# Altium PCB PCB1.PcbDoc
Units mm, origin at the board's own origin, x right, y up, seen from the top; angles counter-clockwise.
Board outline 75 x 75 mm, 2 copper layers (Top Layer, Bottom Layer); 96 components, 51 nets, 235 pads, 79 vias.
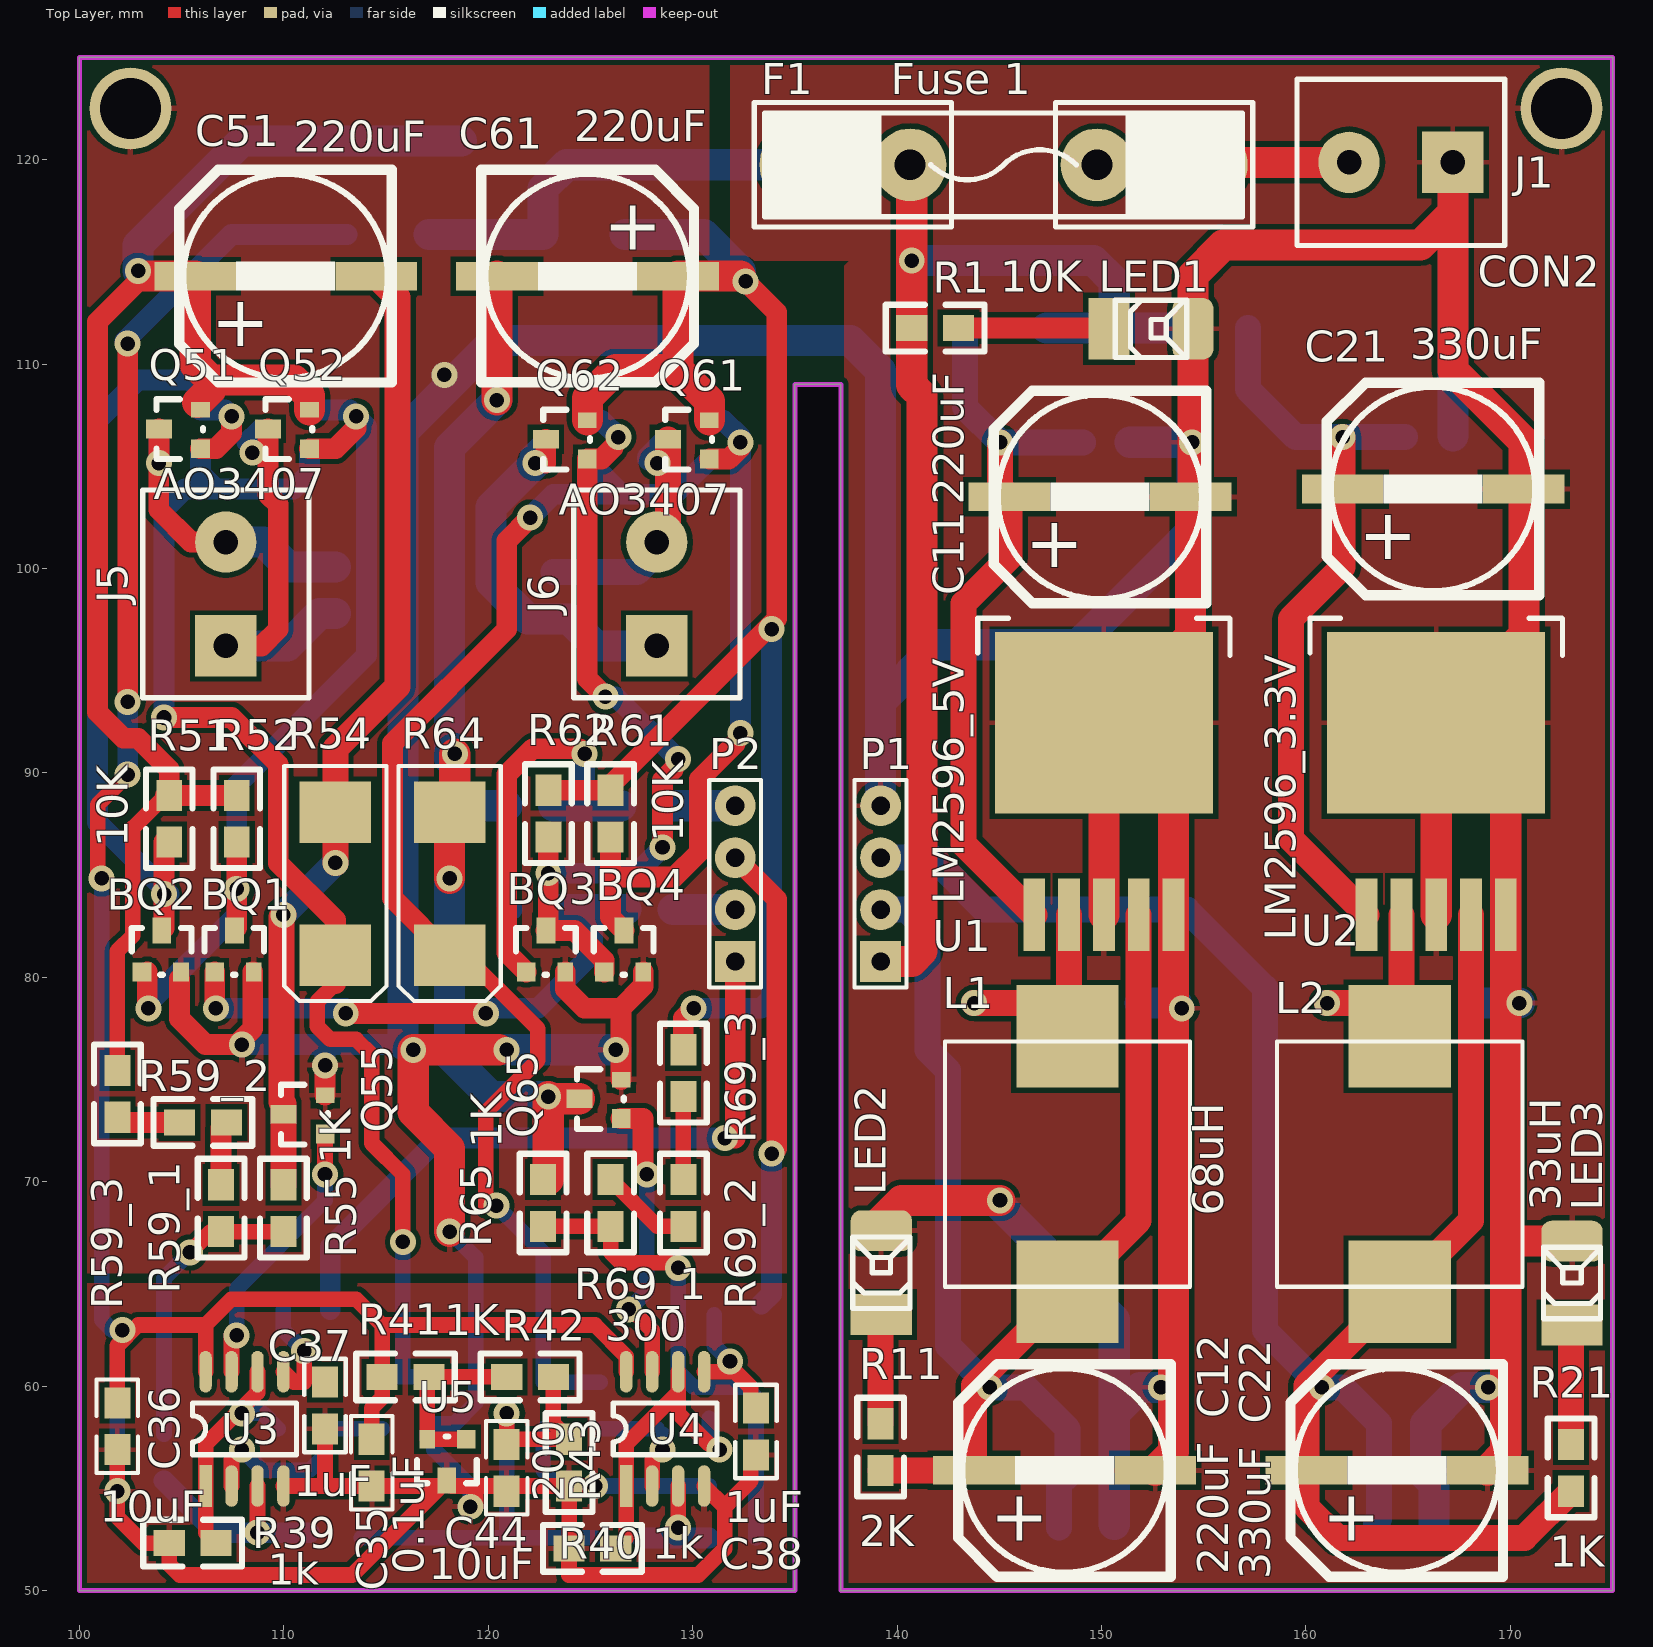
[diagram p0: Top Layer view]
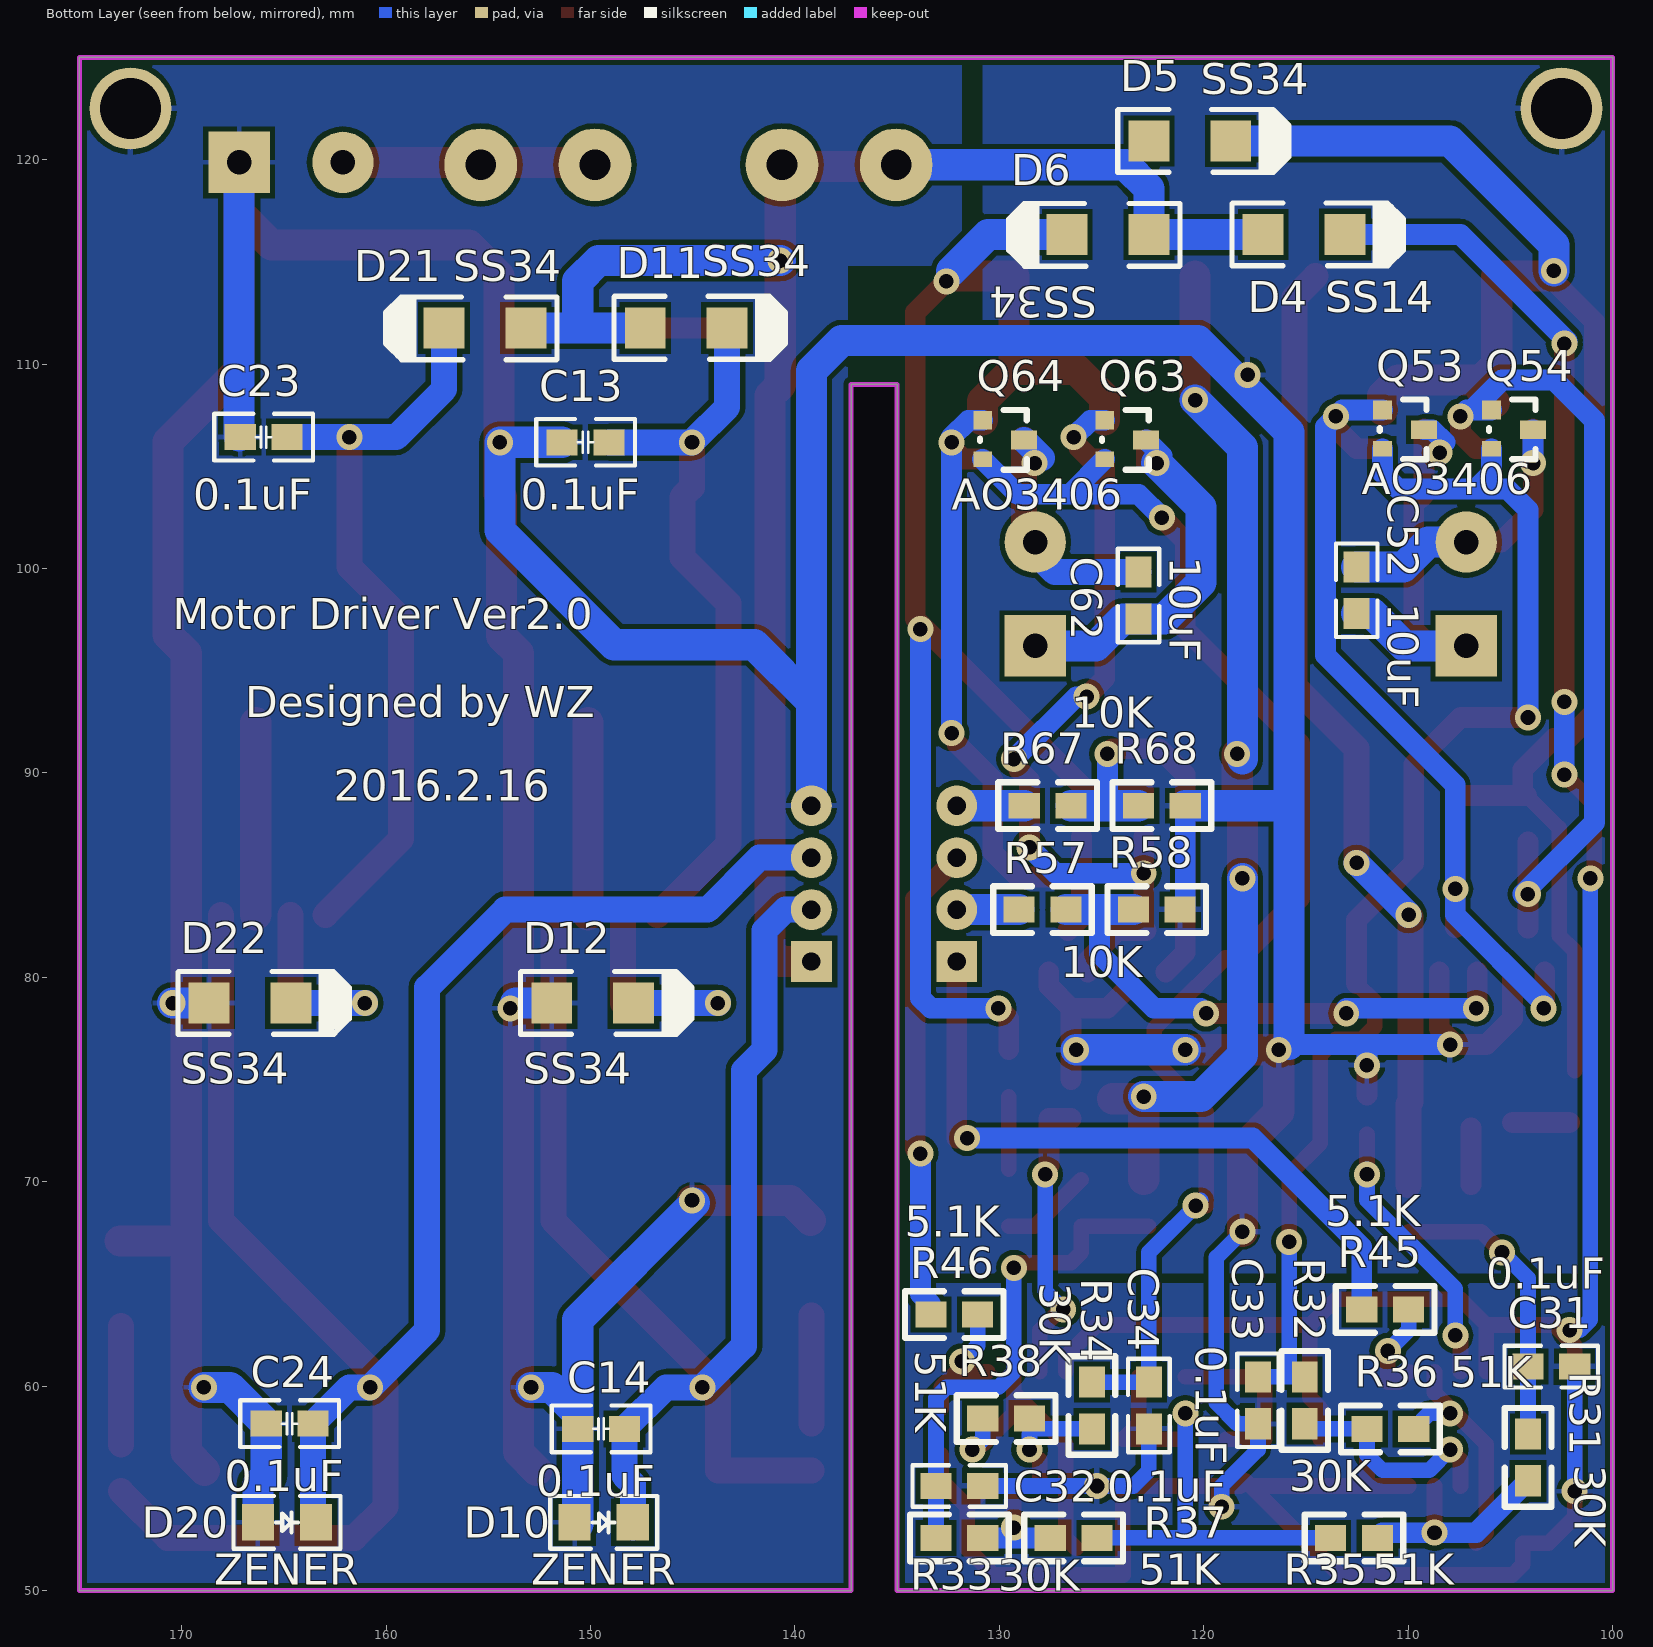
[diagram p1: Bottom Layer view, seen from below]

## Layer stack, top to bottom
Top Solder: solder mask 0.0102, Solder Resist, Dk 3.5
Top Layer: signal copper 0.0356
Dielectric 1: dielectric 0.32, FR-4, Dk 4.8
Bottom Layer: signal copper 0.0356
Bottom Solder: solder mask 0.0102, Solder Resist, Dk 3.5

## Board outline
100,50 100,125 175,125 175,50 137.25,50 137.25,109 135,109 135,50

## Design rules (kind name [scope] priority, off if disabled: settings)
Clearance [All] p1: gap=0.254
PolygonConnect [All] p1: connectstyle=Relief reliefconductorwidth=0.254 reliefentries=4 polygonreliefangle="90 Angle" airgapwidth=0.254
RoutingVias [All] p1: holewidth=0.711 width=1.27 viastyle="Through Hole" minholewidth=0.711 minwidth=1.27 maxholewidth=0.711 maxwidth=1.27
SolderMaskExpansion [All] p1: expansion=0.102
Width [All] p1: maxlimit=2.54 minlimit=0.762 preferedwidth=1.016
30 further rules are at their usual default settings.

## Classes and differential pairs
component class "power supply": C11 C12 C13 C14 C21 C22 C23 C24 D10 D11 D12 D20 D21 D22 F1 J1 L1 L2 LED1 LED2 LED3 P1 R1 R11 R21 U1 U2
component class motor: BQ1 BQ2 BQ3 BQ4 C51 C52 C61 C62 D5 D6 J5 J6 P2 Q51 Q52 Q53 Q54 Q55 Q61 Q62 Q63 Q64 Q65 R51 R52 R54 R55 R57 R58 R59_1 R59_2 R59_3 R61 R62 R64 R65 R67 R68 R69_1 R69_2 R69_3
component class analog: C31 C32 C33 C34 C35 C36 C37 C38 C44 D4 R31 R32 R33 R34 R35 R36 R37 R38 R39 R40 R41 R42 R43 R45 R46 U3 U4 U5

## Components (designator, comment, footprint, x,y, rotation, side; value= is the part's Value field where it differs from the comment)
BQ1 "9014" SOT-23 105.41,83.312 r0 top
BQ2 "9014" SOT-23 101.854,83.312 r0 top
BQ3 "9014" SOT-23 120.65,83.312 r0 top
BQ4 "9014" SOT-23 124.46,83.312 r0 top
C11 "220uF" SMD-EC-F10 145.5,103.5 r0 top
C12 "220uF" SMD-EC-F10 143.764,55.88 r0 top
C13 "0.1uF" 0805C 149.098,106.172 r0 bottom
C14 "0.1uF" 0805C 148.336,57.912 r0 bottom
C21 "330uF" SMD-EC-F10 161.798,103.886 r0 top
C22 "330uF" SMD-EC-F10 160.02,55.88 r0 top
C23 "0.1uF" 0805C 164.846,106.426 r0 bottom
C24 "0.1uF" 0805C 163.576,58.166 r0 bottom
C31 "0.1uF" "0805 CAP" 104.14,60.96 r180 bottom
C32 "0.1uF" "0805 CAP" 133.096,55.118 r180 bottom
C33 "0.1uF" "0805 CAP" 117.348,60.452 r270 bottom
C34 "0.1uF" "0805 CAP" 122.682,60.198 r270 bottom
C35 "0.1uF" "0805 CAP" 114.3,57.404 r270 top
C36 "10uF" "0805 CAP" 101.854,59.182 r270 top
C37 "1uF" "0805 CAP" 112.014,60.198 r270 top
C38 "1uF" "0805 CAP" 133.096,58.928 r270 top
C44 "10uF" "0805 CAP" 120.904,57.15 r270 top
C51 "220uF" SMD-EC-F10 105.664,114.3 r0 top
C52 "10uF" "0805 CAP" 112.522,100.076 r270 bottom
C61 "220uF" SMD-EC-F10 129.286,114.3 r180 top
C62 "10uF" "0805 CAP" 123.19,99.822 r270 bottom
D4 "SS14" SMA 117.094,116.332 r180 bottom
D5 "SS34" SMA 122.682,120.904 r180 bottom
D6 "SS34" SMA 122.682,116.332 r0 bottom
D10 "ZENER" 1206D 149.352,53.34 r180 bottom
D11 "SS34" SMA 147.32,111.762 r180 bottom
D12 "SS34" SMA 151.892,78.74 r180 bottom
D20 "ZENER" 1206D 164.846,53.34 r180 bottom
D21 "SS34" SMA 153.162,111.76 r0 bottom
D22 "SS34" SMA 168.656,78.74 r180 bottom
F1 "Fuse 1" FUSE1 145.206,119.746 r180 top
J1 "CON2" con2 164.592,119.888 r90 top
J5 "CON2" con2 107.188,98.806 r0 top
J6 "CON2" con2 128.27,98.806 r0 top
L1 "68uH" 12x12 148.336,70.866 r90 top
L2 "33uH" 12x12 164.592,70.866 r90 top
LED1 "LED" "3528 led" 153.67,112.522 r270 top
LED2 "LED" "3528 led" 138.43,66.802 r0 top
LED3 "LED" "3528 led" 172.212,66.294 r0 top
P1 "Header 4" HDR1X4 139.192,80.772 r90 top
P2 "Header 4" HDR1X4 132.08,80.772 r90 top
Q51 "AO3407" sot-23 102.87,104.648 r90 top
Q52 "AO3407" sot-23 108.204,104.648 r90 top
Q53 "AO3406" sot-23 108.204,108.966 r270 bottom
Q54 "AO3406" sot-23 102.87,108.966 r270 bottom
Q55 "AO3406" sot-23 108.966,71.12 r90 top
Q61 "AO3407" sot-23 127.762,104.14 r90 top
Q62 "AO3407" sot-23 121.792,104.14 r90 top
Q63 "AO3406" sot-23 121.792,108.458 r270 bottom
Q64 "AO3406" sot-23 127.762,108.458 r270 bottom
Q65 "AO3406" sot-23 123.444,71.882 r90 top
R1 "10K" 0805 143.002,111.76 r180 top
R11 "2K" 0805 139.192,58.166 r270 top
R21 "1K" 0805 172.974,57.15 r270 top
R31 "30K" 0805 104.14,55.372 r90 bottom
R32 "30K" 0805 115.062,58.166 r90 bottom
R33 "30K" 0805 130.81,52.578 r0 bottom
R34 "30K" 0805 125.476,57.912 r90 bottom
R35 "51K" 0805 113.792,52.578 r180 bottom
R36 "51K" 0805 109.728,57.912 r0 bottom
R37 "51K" 0805 125.222,52.578 r0 bottom
R38 "51K" 0805 130.81,58.42 r180 bottom
R39 "1k" 0805 104.394,52.324 r0 top
R40 "1k" 0805 123.952,52.07 r0 top
R41 "1K" 0805 117.094,60.452 r180 top
R42 "300" 0805 123.19,60.452 r180 top
R43 "200" 0805 123.952,55.118 r90 top
R45 "5.1K" 0805 112.268,63.754 r180 bottom
R46 "5.1K" 0805 133.35,63.5 r180 bottom
R51 "10K" 0805 104.394,86.614 r90 top
R52 "10K" 0805 107.696,86.614 r90 top
R54 "1" 2512 112.522,84.582 r270 top
R55 "1K" 0805 109.982,69.85 r270 top
R57 "10K" 0805 126.746,83.312 r0 bottom
R58 "10K" 0805 121.158,83.312 r0 bottom
R59_1 "0" 0805 106.934,69.85 r270 top
R59_2 "5.1K" 0805 107.188,72.898 r180 top
R59_3 "0" 0805 101.854,73.152 r90 top
R61 "10K" 0805 125.984,86.868 r90 top
R62 "10K" 0805 122.936,86.868 r90 top
R64 "1" 2512 118.11,84.582 r270 top
R65 "1K" 0805 122.682,70.104 r270 top
R67 "10K" 0805 126.492,88.392 r0 bottom
R68 "10K" 0805 120.904,88.392 r0 bottom
R69_1 "0" 0805 125.984,70.104 r270 top
R69_2 "5.1K" 0805 129.54,67.818 r90 top
R69_3 "0" 0805 129.54,74.168 r90 top
U1 "LM2596_5V" TO-263 150.114,92.456 r0 top
U2 "LM2596_3.3V" to-263 166.37,92.456 r0 top
U3 "LM358" so-8 106.172,55.118 r90 top
U4 "LM358" so-8 126.746,55.118 r90 top
U5 "TL431" sot-23 120.142,54.356 r180 top

## Footprints (in the part's own frame and the unit in brackets; to place one, negate y for a bottom-side part, rotate by r counter-clockwise, add the part's x,y. Pads: shape width x height; smd on the part's side, far side on the other; paste and mask are expansions set on the pad)
12x12 [mm]
  rect 5x5 smd: 1(-6.25,0) 2(6.25,0)
  silkscreen extent -6,-6 6,6, body extent -6.25,-6.22 6.25,6.28, height 6.7
0805 [mil]
  rect 60x50 smd: 1(0,-0.06) 2(90,-0.06)
  silkscreen extent -50,-45 140,45
"0805 CAP" [mil]
  rect 60x50 smd: 1(0,0) 2(90,0)
  silkscreen extent -45,-40 135,40, body extent 5,-24 84,24, height 37
0805C [mil]
  rect 60x50 smd: 1(0,0) 2(90,0)
  silkscreen extent -50,-45 140,45
1206D [mil]
  rect 62x70 smd: 1(-56,0) 2(56,0)
  silkscreen extent -103,-51 103,51
2512 [mm]
  rect 3x3.5 smd: 1(-3.5,0) 2(3.5,0)
  silkscreen extent -5.75,-2.5 5.75,2.5, body extent -3.27,-1.57 3.13,1.63, height 0.7
"3528 led" [mm]
  rect 3x2 smd paste+0: 1(0.8,-3.3)
  rrect50% 3x2 smd: 2(0.8,0.8)
  silkscreen extent -0.6,-3 2.2,0.5, body extent -0.7,-3.1 2.3,0.6, height 2.1
con2 [mm]
  rect 3x3 hole 1.2: 1(-0.024,-2.594)
  round 3 hole 1.2: 2(-0.024,2.486)
  silkscreen extent -4.09,-5.13 4.04,5.03, body extent -5.52,-4.95 2.48,5.05, height 11
FUSE1 [mil]
  round 140 hole 59.06: 1(-400,0) 1(-180,0) 2(180,0) 2(400,0)
  silkscreen extent -480,-120 480,120
HDR1X4 [mm] "Connector; Header; 4 Position"
  rect 2x2 hole 0.9: 1(0,0)
  round 2 hole 0.9: 2(2.54,0) 3(5.08,0) 4(7.62,0)
  silkscreen extent -1.27,-1.27 8.89,1.27
SMA [mm]
  rect 2x2 smd: 1(0,0) 2(4,0)
  silkscreen extent -1.52,-1.52 6.86,1.55
SMD-EC-F10 [mm]
  rect 4x1.4 smd: 1(0,0) 2(8.86,0)
  silkscreen extent -0.78,-5.2 9.62,5.2
so-8 [mil]
  rect 80x24 smd: 1(0,0)
  oval 80x24 smd: 2(0,-50) 3(0,-100) 4(0,-150) 5(220,-150) 6(220,-100) 7(220,-50) 8(220,0)
  silkscreen extent 60,-175 160,25
SOT-23 [mil]
  rect 36x36 smd: 1(47.76,-120.28)
  rect 30x36 smd: 2(122.76,-120.28)
  rect 36x50 smd: 3(85.76,-40.28)
  silkscreen extent 28,-125 143,-35
sot-23 [mil]
  rect 36x36 smd: 1(47.76,-120.28)
  rect 30x36 smd: 2(122.76,-120.28)
  rect 36x50 smd: 3(85.76,-40.28)
  silkscreen extent 28,-125 143,-35
TO-263 [mil]
  rect 42x140 smd: 1(-134,-370) 2(-67,-370) 3(0,-370) 4(67,-370) 5(134,-370)
  rect 420x350 smd: 3(0,0)
  silkscreen extent -243,130 243,201
to-263 [mil]
  rect 42x140 smd: 1(-134,-370) 2(-67,-370) 3(0,-370) 4(67,-370) 5(134,-370)
  rect 420x350 smd: 3(0,0)
  silkscreen extent -243,130 243,201

## Part data
BQ1 BQ2 BQ3 BQ4: "transistor"
C11 C12 C21 C22 C51 C61: library part "Electrolytic CAP"
C13 C14 C23 C24 C31 C32 C33 C34 C35 C36 C37 C38 C44 C52 C62: library part CAP
D4: "Diode"
D5 D6 D11 D12 D21 D22: library part SS14, "Diode"
F1: "Fuse"
L1 L2: library part Inductance
P1 P2: "Header, 4-Pin"
R1 R11 R21 R31 R32 R33 R34 R35 R36 R37 R38 R39 R40 R41 R42 R43 R45 R46 R51 R52 R54 R55 R57 R58 R59_1 R59_2 R59_3 R61 R62 R64 R65 R67 R68 R69_1 R69_2 R69_3: library part RES, "RES"
U1 U2: library part LM2596, "IC-power"
U5: "IC"

## Free pads (board coordinates)
  round 4 hole 3: 0(102.5,122.5) 0(172.5,122.5)

## Via types
v1: diameter 1.27, hole 0.711, Top Layer to Bottom Layer, 79 vias

## Nets (pads, with @x,y where several pads share a name; then routed paths per layer and width w, separated by ;. In a path a pad name is that pad's centre, name@x,y a point inside that pad or via, vN(x,y) a via of type N, cw(c..) or ccw(c..) an arc to the next point about the centre after c; other vN are vias at no path point)
GND: BQ1.2 BQ2.2 BQ3.2 BQ4.2 C11.2 C12.2 C13.2 C14.2 C21.2 C22.2 C23.2 C24.2 C31.2 C32.2 C33.2 C34.2 C35.2 C36.2 C37.2 C38.2 C44.2 D10.1 D12.1 D20.1 D22.1 J1.1 LED1.2 LED2.2 LED3.2 P1.4 pad.0 Q55.2 Q65.2 R39.1 R40.1 R43.1 R58.1 R68.1 U1.3 U1.5 U2.3 U2.5 U3.4 U4.4 U5.3 | length 469.5
  Top Layer w0.762: C36.2 101.854,53.594 103.126,52.322 R39.1 104.394,51.27 104.902,50.762 113.347,50.762 U5.3@117.703,55.118 ; U3.4 112.014,55.118 ; C37.2 112.014,55.118 ; v1(119.126,54.102) 119.38,54.102 119.38,55.118 ; R43.1 119.38,55.118 ; v1(125.222,55.118) R43.1 123.955,52.072 R40.1 123.952,50.762 130.273,50.762 131.572,52.061 131.572,54.102 ; U4.4 131.572,54.102 ; C38.2@132.842,56.642 132.842,55.372 131.572,54.102 ; 112.014,55.118 C35.2 U5.3@117.703,55.118 ; U5.3@117.703,55.118 U5.3 118.225,55.118 119.38,55.118
  Top Layer w1.016: BQ2.2@104.902,79.933 104.902,77.978 106.172,76.708 107.696,76.708 108.486,77.498 BQ1.2@108.486,80.257 ; Q55.2 v1(112.021,75.692) ; BQ3.2 123.768,79.432 124.714,78.486 126.492,78.486 127.578,79.572 BQ4.2 ; Q65.2 126.499,78.479
  Top Layer w1.524: v1(118.11,67.564) 118.11,71.628 116.332,73.406 v1(116.332,76.454) v1@120.523,76.454 ; LED2.2@139.23,68.11 140.208,69.088 v1(145.034,69.088) ; U1.3@150.114,83.058 U1.3@150.114,92.456 ; C12.2 153.518,56.774 U1.5 153.518,95.86 154.36,96.702 C11.2 ; C11.2@154.47,103.61 LED1.2 154.47,114.338 155.956,115.824 165.608,115.824 167.186,117.402 ; U2.3@166.37,83.058 U2.3@166.37,92.456 ; J1.1 167.186,117.402 ; C22.2 169.774,56.774 U2.5 169.774,95.86 170.658,96.744 C21.2 170.658,106.202 167.186,109.674 167.186,117.402 ; 169.812,67.094 LED3.2
  Bottom Layer w0.762: v1(101.854,54.864) C31.2 ; v1(118.11,67.564) 119.38,66.294 119.38,59.182 118.364,58.166 C33.2 117.348,56.896 119.126,55.118 v1@119.126,54.356 ; C34.2 122.682,55.88 123.444,55.118 v1(125.222,55.118) C32.2
  Bottom Layer w1.016: v1(107.95,76.708) 112.014,76.708 ; v1@112.014,75.699 112.014,76.708 ; v1@115.824,76.708 112.014,76.708 ; R68.1 120.904,83.568 R58.1
  Bottom Layer w1.524: v1@115.824,76.708 115.824,106.68 120.287,111.143 137.723,111.143 139.192,109.674 139.192,93.472 ; 115.826,88.394 R68.1 ; v1(120.904,76.454) v1(126.238,76.454) ; P1.4 139.192,93.472 ; v1@144.907,68.961 150.622,63.246 150.622,58.674 ; D10.1@150.622,53.238 C14.2 150.622,58.674 ; C13.2 v1(154.432,106.172) 154.432,101.854 148.844,96.266 141.986,96.266 139.192,93.472 ; D12.1 v1@153.67,78.74 ; v1(152.908,59.944) 151.892,59.944 150.622,58.674 ; D20.1 166.268,55.22 165.862,55.626 C24.2 167.64,59.944 v1(168.91,59.944) ; C23.2@167.186,106.48 J1.1 ; D22.1 v1(170.434,78.74)
  other v1: 153.924,78.486 117.856,109.474
"M1 C": Q55.1 U3.7 | length 13.7
  Top Layer w0.762: U3.7 v1@107.442,62.484 ; v1(112.014,70.358) Q55.1@112.014,72.326
  Bottom Layer w0.762: v1(107.696,62.484) 107.696,64.77 112.014,69.088 v1(112.014,70.358) v1@112.014,70.612
"M1 CUR": C33.1 Q53.2 Q54.2 R32.2 R54.2 | length 64.3
  Top Layer w0.762: R54.2@112.522,79.7 111.633,78.811 111.633,77.597 112.268,76.962 113.538,76.962 114.3,76.2 114.3,71.882 115.824,70.358 v1(115.824,67.056)
  Top Layer w1.016: v1(104.14,92.71) 107.442,92.71 109.728,90.424 109.728,85.598 112.522,82.804 R54.2 R54.2@112.522,79.7
  Bottom Layer w0.762: R32.2 C33.1 ; 115.824,60.452 v1(115.824,67.056)
  Bottom Layer w1.016: v1(104.14,92.71) 104.14,102.87 105.156,103.886 106.68,103.886 ; Q54.2@105.918,105.848 105.918,104.648 106.68,103.886 ; Q53.2 111.259,104.655 110.49,103.886 106.68,103.886
"M1 DIR": P2.2 R57.2 | length 3
  Bottom Layer w1.524: R57.2 P2.2@132.078,83.314
"M1 PWM": P2.1 R45.1 | length 32.7
  Top Layer w1.016: v1@132.08,72.136 P2.1
  Bottom Layer w1.016: R45.1 112.268,66.802 117.602,72.136 v1@131.064,72.136
  other v1: 131.572,72.136
"M1 S": R36.1 R39.2 U3.1 U3.6 | length 11.7
  Top Layer w0.762: R39.2 106.172,52.83 U3.1 106.172,57.15 108.712,59.69 U3.6
  Bottom Layer w0.762: v1(107.95,58.674) 108.968,58.674 R36.1
"M1 VOL": C31.1 R31.2 R55.2 R59_1.2 | length 14.4
  Top Layer w0.762: v1(105.41,66.548) 106.426,67.564 R59_1.2 R55.2
  Bottom Layer w0.762: R31.2@104.14,57.66 C31.1 104.14,65.278 v1(105.41,66.548)
"M2 C": Q65.1 U4.7 | length 13.9
  Top Layer w0.762: v1(126.873,63.754) 127,63.754 128.016,62.738 U4.7
  Top Layer w1.016: Q65.1 127.565,73.095 v1@127.565,70.809
  Bottom Layer w0.762: v1(126.873,63.754) 127.762,64.643 v1(127.762,70.358)
"M2 CUR": C34.1 Q63.2 Q64.2 R34.2 R64.2 | length 65.1
  Top Layer w0.762: R64.2@118.943,80.955 120.396,79.502 120.414,79.502 122.428,77.488 122.428,75.946 119.888,73.406 v1@119.888,68.834
  Top Layer w1.016: R64.2 115.316,83.876 115.316,91.44 120.904,97.028 120.904,101.346 v1(122.047,102.489)
  Bottom Layer w0.762: v1@120.142,69.088 122.682,66.548 C34.1 R34.2
  Bottom Layer w1.016: v1(122.047,102.489) 123.19,103.632 126.555,103.632 ; Q63.2 126.555,103.632 ; Q64.2 129.109,103.632 126.555,103.632
  other v1: 120.396,68.834
"M2 DIR": P2.4 R67.2 | length 3.3
  Bottom Layer w1.524: R67.2@128.78,88.392 P2.4
"M2 PWM": P2.3 R46.1 | length 22.6
  Top Layer w1.016: P2.3 134.111,83.821 v1@134.111,71.628
  Bottom Layer w1.016: R46.1@133.35,64.006 133.858,64.514 v1(133.858,71.374)
"M2 S": R38.1 R40.2 U4.1 U4.6 | length 14.8
  Top Layer w0.762: R40.2 126.746,52.576 U4.1 126.746,57.15 129.286,59.69 ; U4.6 129.286,59.69 ; v1@130.81,57.15 129.286,58.674 129.286,59.69
  Bottom Layer w0.762: R38.1 130.81,57.404 v1(131.318,56.896)
"M2 VOL": C32.1 R33.2 R65.2 R69_1.2 | length 24.4
  Top Layer w0.762: R65.2 R69_1.2 125.982,66.55 126.49,66.042 v1@129.284,66.042
  Bottom Layer w0.762: v1(129.286,65.786) 129.286,60.706 130.048,59.944 132.588,59.944 133.096,59.436 C32.1 R33.2
NetBQ1_b: BQ1.1 R57.1 R58.2 | length 26.3
  Top Layer w1.016: v1@106.623,78.797 BQ1.1 ; v1(113.03,78.232) v1@119.634,78.232
  Bottom Layer w1.016: v1(106.68,78.486) v1@113.03,78.486 ; v1(119.888,78.232) 120.142,78.486 122.428,78.486 125.095,81.153 125.095,83.314
  Bottom Layer w1.524: R58.2 125.095,83.314 R57.1
NetBQ1_c: BQ1.3 BQ2.1 Q52.1 Q53.1 R52.1 | length 44.5
  Top Layer w1.016: v1@103.321,78.797 BQ2.1@103.321,80.257 ; BQ1.3@107.698,82.433 R52.1 ; Q52.1 112.522,105.861 113.538,106.877 v1(113.538,107.442)
  Bottom Layer w1.016: v1(103.378,78.486) 103.378,78.74 107.696,83.058 v1(107.696,84.328) 107.696,89.408 114.046,95.758 114.046,106.934 v1(113.538,107.442) ; Q53.1 v1@113.227,107.753
NetBQ2_c: BQ2.3 Q51.1 Q54.1 R51.1 | length 40.8
  Top Layer w1.016: BQ2.3@104.142,82.398 R51.1@104.142,86.614 ; Q51.1 106.679,105.861 107.442,106.624 v1(107.442,107.442)
  Bottom Layer w1.016: v1(104.142,84.074) 104.394,84.074 100.889,87.579 100.889,107.239 102.87,109.22 105.41,109.22 106.877,107.753 ; Q54.1 106.877,107.753 ; v1(107.442,107.442) 107.131,107.753 106.877,107.753
NetBQ3_b: BQ3.1 R67.1 R68.2 | length 20
  Top Layer w1.016: BQ3.1 120.904,81.216 120.904,89.916 122.174,91.186 v1@124.46,91.186
  Bottom Layer w1.016: 124.714,88.394 v1(124.714,90.932)
  Bottom Layer w1.524: R68.2 124.714,88.394 R67.1
NetBQ3_c: BQ3.3 BQ4.1 Q62.1 Q63.1 R62.1 | length 38.8
  Top Layer w1.016: BQ3.3 124.213,82.289 125.673,80.829 BQ4.1 ; BQ3.3@122.938,82.398 R62.1 ; v1(125.73,93.726) 124.847,94.609 Q62.1 125.545,105.353 v1@126.11,105.918 ; v1(128.524,86.36) 128.524,89.642 v1@129.048,90.166
  Bottom Layer w1.016: v1(122.936,85.09) 127.254,85.09 v1(128.524,86.36) ; Q63.1 125.545,107.245 v1(126.364,106.426) ; v1(125.73,93.726) 126.238,93.726 v1(129.286,90.678)
NetBQ4_c: BQ4.3 Q61.1 Q64.1 R61.1 | length 33.3
  Top Layer w1.016: R61.1 125.986,84.905 ; BQ4.3 125.986,82.941 125.986,84.905 ; Q61.1 131.769,105.353 v1@132.334,105.918 ; v1@132.08,91.44 130.318,89.678 130.318,86.122 129.101,84.905 125.986,84.905
  Bottom Layer w1.016: Q64.1 131.515,107.245 v1@132.334,106.426 ; v1(132.334,91.948) v1@132.334,105.918
  other v1: 132.334,106.172
NetC11_1: C11.1 C13.1 D11.2 U1.1 | length 36
  Top Layer w1.27: v1(145.034,106.172) 145.034,103.966 C11.1 145.5,100.542 143.256,98.298 143.256,86.512 U1.1
  Bottom Layer w1.27: D11.2 143.32,107.886 v1(145.034,106.172) C13.1
NetC21_1: C21.1 C23.1 D21.2 U2.1 | length 37.6
  Top Layer w1.27: v1(161.798,106.426) C21.1 161.798,100.076 159.258,97.536 159.258,86.766 U2.1
  Bottom Layer w1.27: D21.2 157.162,108.776 159.512,106.426 v1(161.798,106.426) C23.1
NetC35_1: C35.1 C36.1 D4.2 R41.2 U3.8 U4.8 | length 100.5
  Top Layer w0.762: v1@100.889,84.836 100.889,88.443 v1(102.362,89.916) ; C36.1 101.854,61.976 102.87,62.992 106.172,62.992 ; U3.8 106.172,62.992 ; C35.1 114.3,58.928 114.808,59.436 R41.2 114.808,62.992 ; U4.8 126.746,61.468 125.222,62.992 114.808,62.992 ; 106.172,62.992 107.442,64.262 113.538,64.262 114.808,62.992
  Top Layer w1.016: v1@102.362,93.726 v1(102.362,110.998)
  Bottom Layer w0.762: v1(101.092,84.836) 101.092,63.246 v1@101.6,62.738
  Bottom Layer w1.016: v1@102.235,111.125 107.442,116.332 D4.2 ; v1(102.362,89.916) v1(102.362,93.472)
  other v1: 102.108,62.738
NetC37_1: C37.1 R45.2 U3.5 | length 4.9
  Top Layer w0.762: U3.5 110.49,60.198 110.998,60.198 v1@110.998,61.468
  Bottom Layer w0.762: R45.2 109.982,62.738 v1(110.998,61.722)
NetC38_1: C38.1 R46.2 U4.5 | length 6.2
  Top Layer w0.762: U4.5 132.08,60.706 132.842,59.944 C38.1@132.842,58.928
  Bottom Layer w0.762: R46.2 131.064,61.976 v1(131.826,61.214)
NetC51_1: C51.1 D5.2 Q51.2 Q52.2 R51.2 R52.2 R59_3.2 | length 80.4
  Top Layer w0.762: R59_3.2 101.856,81.282 102.616,82.042 102.616,87.309 R51.2@104.207,88.9
  Top Layer w1.016: v1@103.124,114.3 100.889,112.065 100.889,92.969 102.164,91.694 102.87,91.694 104.396,90.168 R51.2 ; R51.2@104.207,88.9 R51.2 ; R52.2 R51.2
  Top Layer w1.524: v1@103.124,114.3 C51.1 105.664,109.982 106.426,109.22 ; Q51.2@105.791,108.126 106.426,108.761 106.426,109.22 ; Q52.2 111.259,108.451 110.49,109.22 106.426,109.22
  Bottom Layer w1.524: v1(102.87,114.554) 102.87,115.824 107.95,120.904 D5.2
NetC51_2: C51.2 Q55.3 R54.1 R55.1 | length 47.1
  Top Layer w1.27: 109.883,73.912 109.883,82.959 v1(109.982,83.058) ; R55.1 109.98,73.797 ; v1(112.522,85.598) R54.1 112.522,91.186 115.57,94.234 115.57,113.254 C51.2
  Bottom Layer w1.27: v1(109.982,83.058) v1(112.522,85.598)
NetC52_1: C52.1 J5.2 Q51.3 Q54.3 | length 15.4
  Top Layer w1.016: Q51.3 103.893,105.099 103.886,105.091 103.886,102.87 105.464,101.292 J5.2
  Bottom Layer w1.016: v1@103.877,105.153 v1@103.893,105.099 ; v1@103.893,105.163 Q54.3
  Bottom Layer w1.524: J5.2 109.02,101.292 110.236,100.076 C52.1
  other v1: 103.886,105.156
NetC52_2: C52.2 J5.1 Q52.3 Q53.3 | length 20.2
  Top Layer w1.016: J5.1 108.912,96.212 109.728,97.028 109.728,103.124 109.227,103.625 Q52.3
  Bottom Layer w1.016: v1@108.204,106.172 108.82,106.788 Q53.3
  Bottom Layer w1.524: J5.1 110.182,96.212 111.76,97.79 C52.2
  other v1: 108.458,105.664
NetC61_1: C61.1 D6.2 Q61.2 Q62.2 R61.2 R62.2 R69_3.2 | length 79.6
  Top Layer w1.016: R62.2 125.73,89.154 134.111,97.535 134.111,112.521 134.112,112.522 v1(132.588,114.046) v1@132.334,114.3 ; R69_3.2 129.542,77.98 v1(130.048,78.486)
  Top Layer w1.524: Q62.2 124.847,108.337 126.238,109.728 129.286,109.728 ; Q61.2 130.817,108.197 129.286,109.728 ; v1@132.334,114.3 C61.1 129.286,109.728
  Bottom Layer w1.016: v1(130.048,78.486) 133.35,78.486 133.858,78.994 v1(133.858,97.028)
  Bottom Layer w1.524: D6.2 130.556,116.332 v1@132.334,114.554
NetC61_2: C61.2 Q65.3 R64.1 R65.1 | length 50.2
  Top Layer w1.524: v1(118.11,84.836) R64.1 ; R64.1@118.364,88.336 v1(118.364,90.932) ; v1(120.426,108.234) C61.2 ; R65.1@122.936,70.104 v1(122.936,74.168) ; v1@123.044,74.06 Q65.3
  Bottom Layer w1.524: v1(118.11,84.836) 118.11,76.2 120.142,74.168 v1(122.936,74.168) ; v1@118.11,90.678 118.11,105.918 v1(120.426,108.234)
NetC62_1: C62.1 J6.2 Q61.3 Q64.3 | length 12.4
  Top Layer w1.27: J6.2@128.785,101.323 Q61.3
  Bottom Layer w1.27: C62.1 127.284,99.822 J6.2@128.754,101.292 ; v1@127.915,105.41 Q64.3
  other v1: 128.27,105.156
NetC62_2: C62.2 J6.1 Q62.3 Q63.3 | length 18.9
  Top Layer w1.016: v1@122.815,105.156 Q62.3
  Bottom Layer w1.016: v1@122.046,105.511 Q63.3
  Bottom Layer w1.524: v1(122.3,105.156) 120.142,102.998 120.142,99.314 121.92,97.536 C62.2 123.952,97.536 125.276,96.212 J6.1@128.754,96.212
NetD12_2: D12.2 L1.2 U1.2 | length 13.1
  Top Layer w1.27: v1(143.764,78.74) 148.412,78.74 U1.2
  Bottom Layer w1.27: v1(143.764,78.74) D12.2
NetD22_2: D22.2 L2.2 U2.2 | length 11.6
  Top Layer w1.27: v1(161.036,78.74) 164.668,78.74 U2.2
  Bottom Layer w1.27: v1(161.036,78.74) D22.2
NetF1_1: F1.1 J1.2 | length 12.4
  Top Layer w1.524: F1.1@150.014,119.746 149.896,119.864 J1.2
NetLED1_1: LED1.1 R1.1 | length 7.3
  Top Layer w1.016: R1.1 LED1.1@150.33,111.762
NetLED2_1: LED2.1 R11.1 | length 5.3
  Top Layer w1.27: R11.1 LED2.1@139.19,63.462
NetLED3_1: LED3.1 R21.1 | length 5.8
  Top Layer w1.27: R21.1 LED3.1@172.972,62.954
NetR31_1: R31.1 R35.2 U3.3 | length 10.2
  Top Layer w0.762: v1@108.712,53.086 U3.3
  Bottom Layer w1.016: R31.1 106.678,52.832 v1(108.712,52.832) R35.2@111.25,52.832
NetR32_1: R32.1 R36.2 U3.2 | length 10.9
  Top Layer w0.762: U3.2 107.442,56.388 v1(107.95,56.896)
  Bottom Layer w0.762: v1(107.95,56.896) 108.966,55.88 111.252,55.88 112.014,56.642 R36.2 R32.1@114.808,57.914
NetR33_1: R33.1 R37.2 U4.3 | length 5.1
  Top Layer w0.762: v1@129.286,53.34 U4.3
  Bottom Layer w1.016: R37.2 R33.1
  other v1: 129.286,53.086
NetR34_1: R34.1 R38.2 U4.2 | length 4.8
  Top Layer w0.762: U4.2 128.016,56.388
  Bottom Layer w0.762: R34.1 R38.2@128.268,57.912 ; v1(128.524,56.896) 128.524,57.656
NetR41_1: R41.1 R42.2 U5.1 U5.2 | length 8.8
  Top Layer w0.762: U5.1 U5.2 117.024,60.384 R41.1 R42.2
NetR59_1_1: R59_1.1 R59_2.1 | length 2.8
  Top Layer w1.016: R59_1.1 R59_2.1@106.932,72.644
NetR59_2_2: R59_2.2 R59_3.1 | length 2.8
  Top Layer w1.016: R59_3.1@102.108,72.9 R59_2.2
NetR69_1_1: R69_1.1 R69_2.1 | length 4.5
  Top Layer w0.762: R69_1.1 125.991,70.104 128.277,67.818 R69_2.1
NetR69_2_2: R69_2.2 R69_3.1 | length 3.6
  Top Layer w0.762: R69_2.2@129.542,70.612 R69_3.1
VCC_3.3V: C22.1 C24.1 D20.2 L2.1 P1.3 R21.2 U2.4 | length 97.4
  Top Layer w1.27: U2.4 168.072,68.096 L2.1 160.02,60.044 C22.1 160.02,54.102 161.544,52.578 170.686,52.578 R21.2
  Bottom Layer w1.27: P1.3 141.732,85.852 144.272,83.312 154.178,83.312 157.988,79.502 157.988,62.738 v1(160.782,59.944) 161.798,59.944 C24.1 163.576,53.492 D20.2
VCC_5V: C12.1 C14.1 D10.2 L1.1 P1.2 R11.2 U1.4 | length 71.3
  Top Layer w1.27: R11.2 C12.1 143.764,60.044 L1.1 151.816,68.096 U1.4 ; P1.2 P1.2@139.409,83.312
  Bottom Layer w1.27: P1.2 140.462,83.312 141.478,82.296 141.478,76.454 142.494,75.438 142.494,61.976 v1(144.526,59.944) 146.304,59.944 C14.1 148.336,55.626 147.93,55.22 D10.2@147.93,53.086
VCC_12V: D4.1 D5.1 D6.1 D11.1 D21.1 F1.2 P1.1 R1.2 | length 85.6
  Top Layer w1.524: F1.2@135.128,119.664 140.716,119.664 v1(140.716,115.062) R1.2 140.716,108.966 141.224,108.458 141.224,81.28 140.716,80.772 P1.1
  Bottom Layer w1.524: D4.1 D6.1 122.682,118.588 123.84,119.746 F1.2@135.046,119.746 ; v1(140.716,115.062) 149.606,115.062 150.622,114.046 150.622,111.762 ; D11.1 150.622,111.762 ; D21.1@153.16,111.762 150.622,111.762
VOLREF_1V: C44.1 R35.1 R37.1 R42.1 R43.2 | length 25.5
  Top Layer w0.762: v1@120.904,58.928 v1(120.904,58.674) 120.904,57.404 R43.2 123.19,58.168 R42.1
  Bottom Layer w0.762: R35.1 120.904,52.576 ; v1(120.904,58.674) 120.904,52.576 ; R37.1@125.219,52.576 120.904,52.576

## Polygon pours and split planes (outlines as drawn)
GND on Top Layer "Top Layer-GND" (solid, remove dead copper, pour order 6): 135,50.04 135,65.024 100,65.024 100,50
GND on Top Layer "Top Layer-GND" (solid, remove dead copper, pour order 4): 100,125 130.778,125 130.81,124.968 130.81,112.828 134.366,112.828 134.874,112.322 134.874,65.532 100,65.532
GND on Top Layer "Top Layer-GND" (solid, remove dead copper, pour order 2): 175,50 137.414,50 137.414,114.808 137.668,115.062 131.826,115.062 131.826,124.746 131.572,125 174.752,125
GND on Bottom Layer "Bottom Layer-GND" (solid, remove dead copper, pour order 12): 135,50 100,50 100,65.024 134.874,65.024
GND on Bottom Layer "Bottom Layer-GND" (solid, remove dead copper, pour order 10): 100,125 130.81,125 130.81,109.22 131.03,109 135,109 135,65.278 134.746,65.532 100,65.532
GND on Bottom Layer "Bottom Layer-GND" (solid, remove dead copper, pour order 8): 175,50 137.25,50 137.414,50.164 137.414,114.808 131.826,114.808 131.826,125 175,125

## Keep-outs
Keep-Out Layer:
  the board outline again, w0.254

## Silkscreen, mask and mechanical layers (free items; w line width, h text height)
Bottom Overlay:
  text "Motor Driver Ver2.0" at 170.434,97.028 h1.52
  text "Designed by WZ" at 166.878,92.71 h1.52
  text "2016.2.16" at 162.56,88.646 h1.52
Mechanical 1:
  circle w0.254: c172.5,122.5 r1.5
  circle w0.254: c102.5,122.5 r1.5

## Text inside footprints (layer, text, board x,y; h text height)
C11: Top Overlay "+" at 146.28,100.06 h2.5
C12: Top Overlay "+" at 144.544,52.44 h2.5
C21: Top Overlay "+" at 162.578,100.446 h2.5
C22: Top Overlay "+" at 160.8,52.44 h2.5
C51: Top Overlay "+" at 106.444,110.86 h2.5
C61: Top Overlay "+" at 128.506,117.74 h2.5 r180